# Altium PCB PCB-Main.PcbDoc
Units mm, origin at the board's own origin, x right, y up, seen from the top; angles counter-clockwise.
Board outline 45.2 x 20.4 mm, 2 copper layers (Top Layer, Bottom Layer), stack 1.271 mm thick; 40 components, 26 nets, 142 pads, 46 vias.
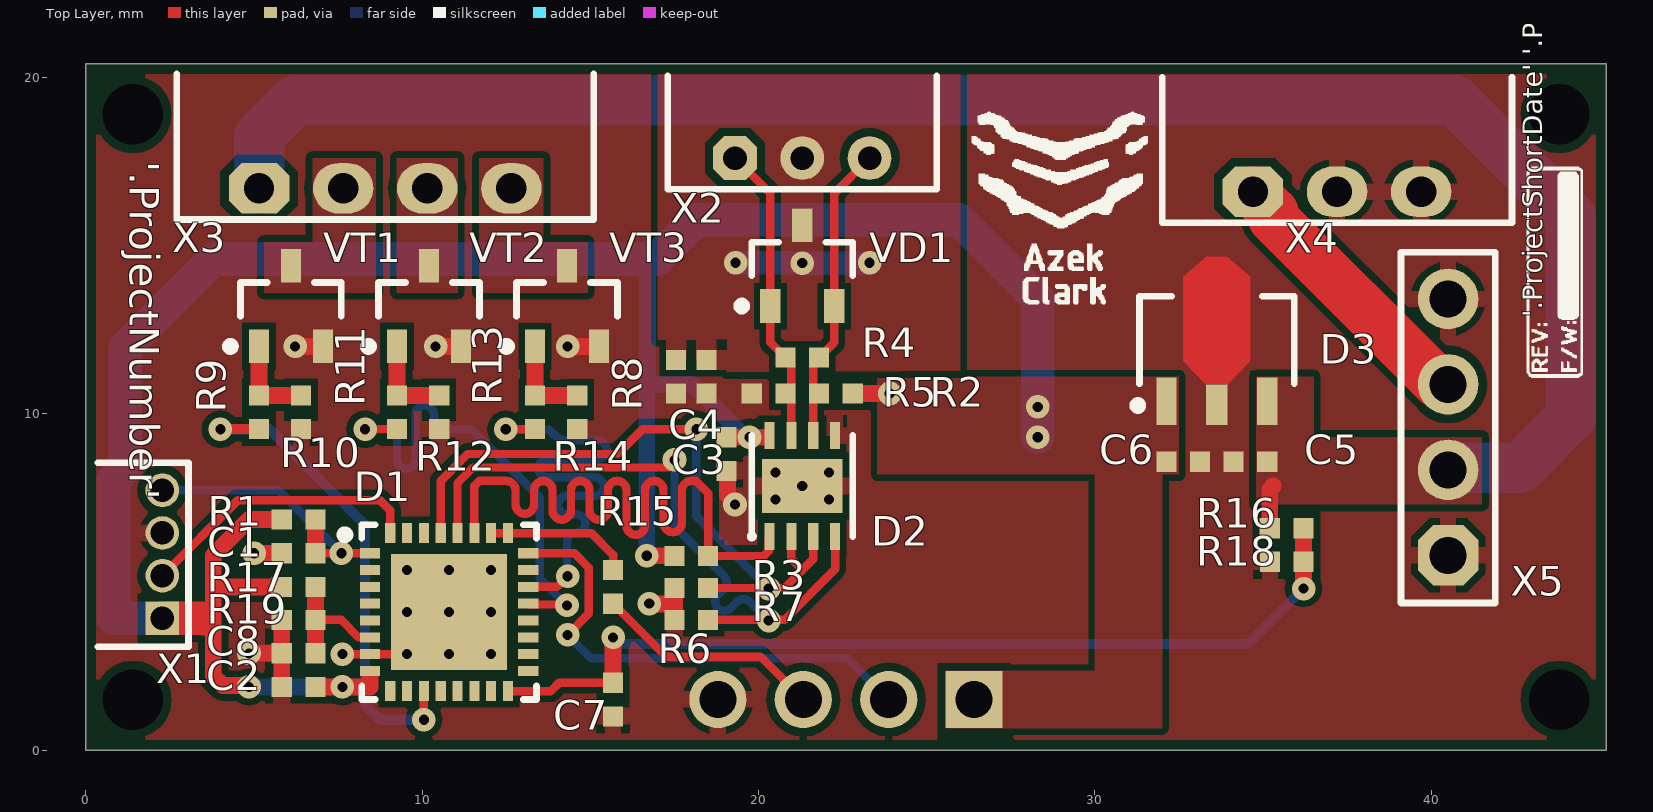
[diagram p0: Top Layer view]
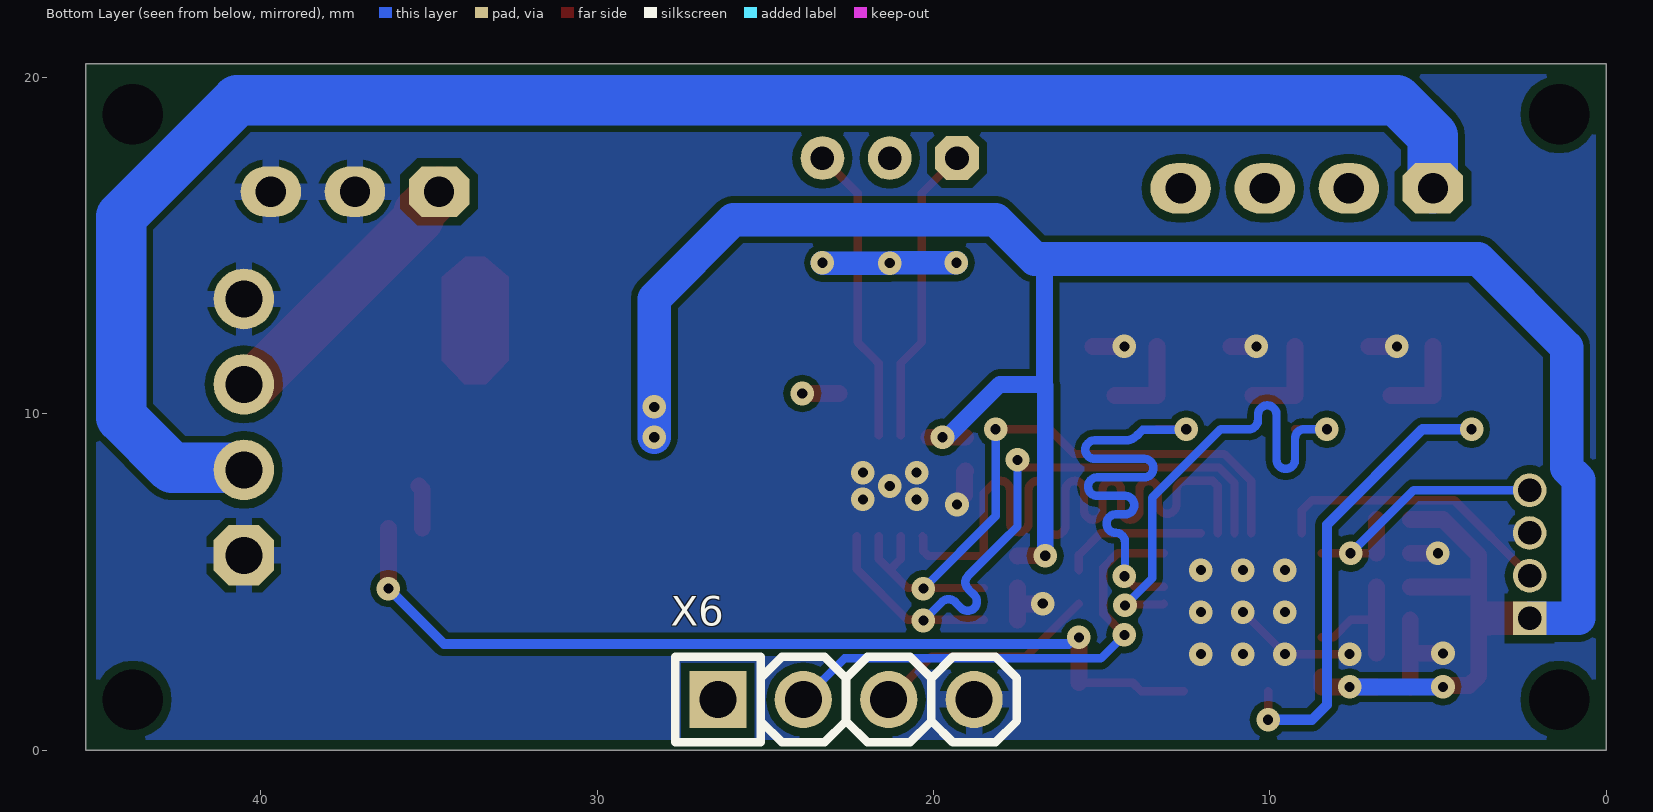
[diagram p1: Bottom Layer view, seen from below]
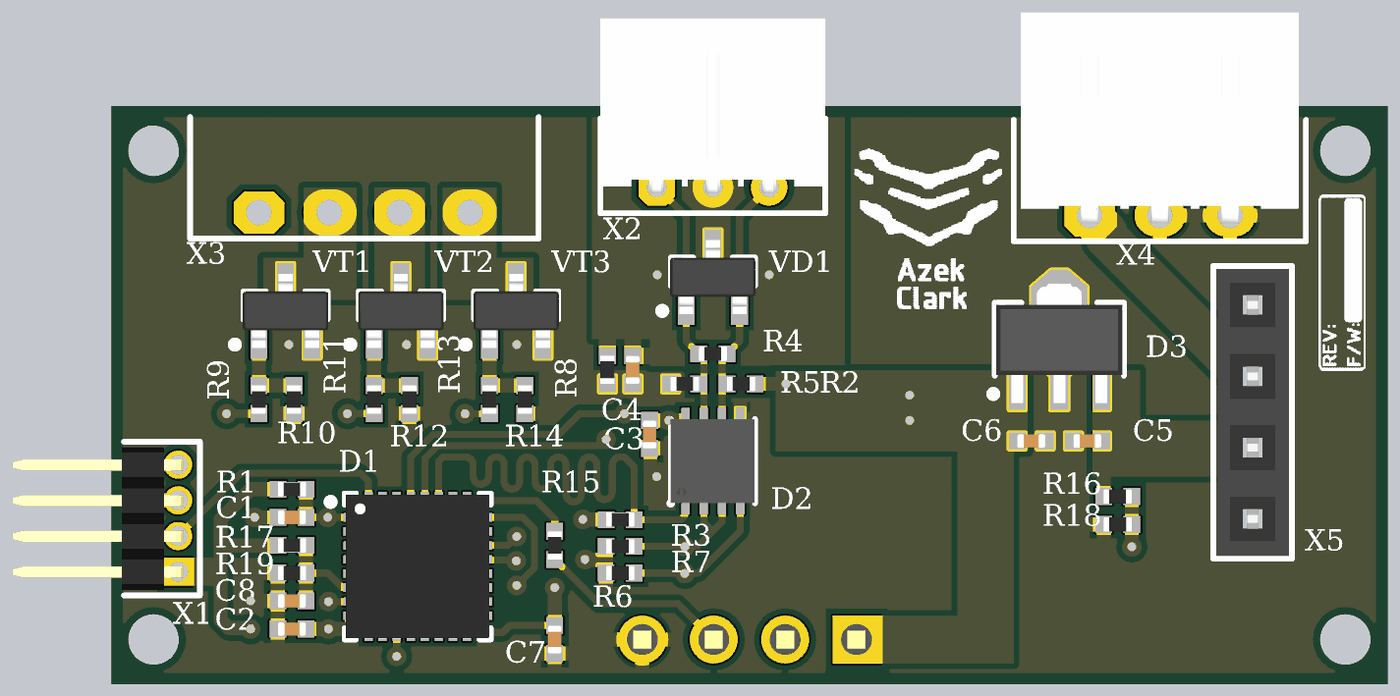
[diagram p2: 3D render of the assembled board from above, using the file's embedded part models]

## Layer stack, top to bottom
Top Solder: solder mask 0.0102, Solder Resist, Dk 3.5
Top Layer: signal copper 0.0356
Dielectric 1: dielectric 1.2, FR-4, Dk 4.8
Bottom Layer: signal copper 0.0356
Bottom Solder: solder mask 0.0102, Solder Resist, Dk 3.5

## Board outline
0,0 0,20.4 45.2,20.4 45.2,0

## Design rules (kind name [scope] priority, off if disabled: settings)
BoardOutlineClearance [All] p1: gap=0.3 ignorepadtopadclearanceinfootprint=FALSE
Clearance Clearance_NPTH [All vs InPadClass('NPTH')] p1: gap=0.4 ignorepadtopadclearanceinfootprint=FALSE except(0: Arc-Hole Track-Hole SMDPad-Hole THPad-Hole Via-Hole Fill-Hole Poly-Hole Region-Hole Text-Hole)
Clearance Clearance_MultiLayerPad [OnLayer('Multi-Layer') and IsPad] p2: gap=0.25 ignorepadtopadclearanceinfootprint=FALSE except(0: Arc-Hole Track-Hole SMDPad-Hole THPad-Hole Via-Hole Fill-Hole Poly-Hole Region-Hole Text-Hole)
Clearance Clearance_Polygon [InPolygon] p3: gap=0.2 ignorepadtopadclearanceinfootprint=FALSE except(0: Arc-Hole Track-Hole SMDPad-Hole THPad-Hole Via-Hole Fill-Hole Poly-Hole Region-Hole Text-Hole)
Clearance [All] p4: gap=0.15 ignorepadtopadclearanceinfootprint=FALSE except(0: Arc-Hole Track-Hole SMDPad-Hole THPad-Hole Via-Hole Fill-Hole Poly-Hole Region-Hole Text-Hole)
ComponentClearance [All] p1: gap=-0.2 collisioncheckmode=3 verticalgap=0.254 showdistances=FALSE
DiffPairsRouting [All] p1: maxlimit=0.254 minlimit=0.2 mostfreqgap=0.254 toplayer_minwidth=0.2 toplayer_maxwidth=0.5 toplayer_prefwidth=0.3 bottomlayer_minwidth=0.2 bottomlayer_maxwidth=0.5 bottomlayer_prefwidth=0.3 maxuncoupledlength=12.7
Height [All] p1: minheight=0 maxheight=60 prefheight=12.7
HoleSize [All] p1: absolutevalues=TRUE maxlimit=5 minlimit=0.025 maxpercent=80.000 minpercent=20.000
HoleToHoleClearance [All] p1: gap=0.2 allowstackedmicrovias=TRUE
MatchedLengths "Schematic Matched Net Lengths_2" [InNetClass('RS485')] p1: tolerance=0.05 checknetsindiffpair=TRUE checkdiffpairvsdiffpair=FALSE checkxsignals=FALSE checkothers=FALSE
MatchedLengths "Schematic Matched Net Lengths_1" [InNetClass('RS485 UART')] p2: tolerance=0.1 checknetsindiffpair=FALSE checkdiffpairvsdiffpair=TRUE checkxsignals=TRUE checkothers=TRUE
MatchedLengths "Schematic Matched Net Lengths" [InNetClass('PWM LED')] p3: tolerance=0.1 checknetsindiffpair=FALSE checkdiffpairvsdiffpair=TRUE checkxsignals=TRUE checkothers=TRUE
MatchedLengths MatchedLengths_RMII [InNetClass('RMII')] p4: tolerance=2.54 checknetsindiffpair=FALSE checkdiffpairvsdiffpair=TRUE checkxsignals=TRUE checkothers=TRUE
MinimumSolderMaskSliver [All] p1: minsoldermaskwidth=0.05
PlaneClearance [All] p1: clearance=0.5
PlaneConnect [All] p1: planeconnectstyle=Relief reliefexpansion=0.5 reliefentries=4 reliefconductorwidth=0.3 reliefairgap=0.2
PolygonConnect PolygonConnect_PowerPAD [All vs InPadClass('PowerPAD')] p1: connectstyle=Relief reliefconductorwidth=1 reliefentries=4 polygonreliefangle="90 Angle" airgapwidth=0.3
PolygonConnect PolygonConnect_PadGND [InNet('GND') and IsPad] p2: connectstyle=Relief reliefconductorwidth=0.5 reliefentries=4 polygonreliefangle="90 Angle" airgapwidth=0.2
PolygonConnect PolygonConnect_Via [IsVia] p3: connectstyle=Direct reliefconductorwidth=0.254 reliefentries=4 polygonreliefangle="90 Angle" airgapwidth=0.254
PolygonConnect [All] p4: connectstyle=Relief reliefconductorwidth=0.6 reliefentries=4 polygonreliefangle="90 Angle" airgapwidth=0.3
RoomDefinition Board-ADC [InComponentClass('Board-ADC')] p1: confinementstyle=ConfineIn formatcopy=TRUE lockcomponents=FALSE outline 4.489,0 37.2,0 37.2,7.528 4.489,7.528
RoomDefinition Board-Ultrasonic [InComponentClass('Board-Ultrasonic')] p2: confinementstyle=ConfineIn formatcopy=TRUE lockcomponents=FALSE outline 14.609,-0.85 28.3,-0.85 28.3,6.101 14.609,6.101
RoomDefinition MCU [InComponentClass('MCU')] p3: confinementstyle=ConfineIn formatcopy=TRUE lockcomponents=FALSE outline -4.15,1 14.004,1 14.004,8.757 -4.15,8.757
RoomDefinition Board-RS485 [InComponentClass('Board-RS485')] p4: confinementstyle=ConfineIn formatcopy=TRUE lockcomponents=FALSE outline 25.65,2.9 25.65,24 16.2,24 16.2,2.9
RoomDefinition Board-PWM [InComponentClass('Board-PWM')] p5: confinementstyle=ConfineIn formatcopy=TRUE lockcomponents=FALSE outline 2.5,7.9 16.3,7.9 16.3,24.4 2.5,24.4
RoomDefinition Board-PowerSupply [InComponentClass('Board-PowerSupply')] p6: confinementstyle=ConfineIn formatcopy=TRUE lockcomponents=FALSE outline 30.612,3.739 42.884,3.739 42.884,24.4 30.612,24.4
RoutingVias [All] p1: holewidth=0.3 width=0.7 viastyle="Through Hole" minholewidth=0.3 minwidth=0.7 maxholewidth=0.5 maxwidth=1.2
SilkToSilkClearance [All] p1: silktosilkclearance=0
SilkToSolderMaskClearance [IsPad] p1: minsilkscreentomaskgap=0.05 clearancetoexposedcopper=TRUE
SolderMaskExpansion SolderMaskExpansion_Vias [IsVia] p1: expansion=0.102 istentingtop=TRUE
SolderMaskExpansion [All] p2: expansion=0.075 istentingtop=FALSE
Width [All] p1: maxlimit=10 minlimit=0.15 preferedwidth=0.15
20 further rules are at their usual default settings.

## Classes and differential pairs
component class Board-ADC: C7 C8 R16 R17 R18 R19
net class "RS485 UART": "RS485 DIR" "RS485 RX" "RS485 TX"
net class RS485: RS485_N RS485_P
net class "PWM LED": "PWM CH1" "PWM CH2" "PWM CH3"
component class MCU: C1 C2 D1 R1 X1
component class Board-Ultrasonic: R15 X6
component class Board-RS485: C3 C4 D2 R2 R3 R4 R5 R6 R7 R8 VD1 X2
component class Board-PWM: R9 R10 R11 R12 R13 R14 VT1 VT2 VT3 X3
component class Board-PowerSupply: C5 C6 D3 X4 X5
differential pair RS485: +RS485_P -RS485_N

## Components (designator, comment, footprint, x,y, rotation, side; value= is the part's Value field where it differs from the comment)
C1 "100nF" CH0402C 6.325,5.85 r0 top
C2 "100nF" CH0402C 6.325,1.875 r0 top
C3 "100nF" CH0402C 19.05,8.8 r90 top
C4 "100nF" CH0402C 18.45,11.1 r90 top
C5 "100nF" CH0402C 34.625,8.57 r0 top
C6 "100nF" CH0402C 32.625,8.57 r180 top
C7 "100nF" CH0402C 15.671,1.5 r90 top
C8 "100nF" CH0402C 6.325,2.875 r0 top
D1 "STM8L151KxU6" 32-UFQFPN 10.8,4.1 r0 top
D2 "SIT3088E" "8-DFN (3x3 mm, 0.65mm pitch)" 21.3,7.85 r0 top
D3 "L78L33ACUTR" SOT89_123 33.625,12.17 r90 top
R1 "10k" CH0402R 6.325,6.85 r180 top
R2 "10k" CH0402R 22.3,10.6 r0 top
R3 "10k" CH0402R 18,5.767 r180 top
R4 "120" CH0402R 21.3,11.671 r0 top
R5 "10k" CH0402R 20.3,10.6 r0 top
R6 "10k" CH0402R 18,3.867 r0 top
R7 "10k" CH0402R 18,4.817 r0 top
R8 "120" CH0402R 17.55,11.1 r90 top
R9 "22" CH0402R 5.146,10.045 r90 top
R10 "10k" CH0402R 6.4,10.045 r90 top
R11 "22" CH0402R 9.25,10.045 r90 top
R12 "10k" CH0402R 10.504,10.045 r90 top
R13 "22" CH0402R 13.354,10.045 r90 top
R14 "10k" CH0402R 14.609,10.045 r90 top
R15 "22" CH0402R 15.671,4.85 r270 top
R16 "21k" CH0402R 35.7,6.592 r180 top
R17 "3k" CH0402R 6.325,4.85 r180 top
R18 "3k" CH0402R 35.704,5.597 r0 top
R19 "3k" CH0402R 6.325,3.867 r0 top
VD1 "SM712" SOT23_132 21.3,14.4 r90 top
VT1 "SI2302S" SOT23_123 6.096,13.2 r90 top
VT2 "SI2302S" SOT23_123 10.2,13.2 r90 top
VT3 "SI2302S" SOT23_123 14.304,13.2 r90 top
X1 "PLS1.27-4R" "CON: PLS1.27-4R" 2.275,5.819 r90 top
X2 "PH-3AW" "CON: PH-3AW" 21.3,17.6 r0 top
X3 "XH-4AW" "CON: XH-4AW" 8.9,16.7 r0 top
X4 "XH-3AW" "CON: XH-3AW" 37.2,16.6 r0 top
X5 "PBS-4" "CON: PBS-4" 40.5,9.6 r90 top locked
X6 "PLS-4" "CON: PLS-4" 22.6,1.5 r180 bottom

## Footprints (in the part's own frame and the unit in brackets; to place one, negate y for a bottom-side part, rotate by r counter-clockwise, add the part's x,y. Pads: shape width x height; smd on the part's side, far side on the other; paste and mask are expansions set on the pad)
"8-DFN (3x3 mm, 0.65mm pitch)" [mm]
  rect 2.4x1.6 smd: 0(0,0)
  rect 0.3x0.8 smd: 1(-0.975,-1.5) 2(-0.325,-1.5) 3(0.325,-1.5) 4(0.975,-1.5) 5(0.975,1.5) 6(0.325,1.5) 7(-0.325,1.5) 8(-0.975,1.5)
  silkscreen extent -1.6,-1.6 1.5,1.5, body extent -1.5,-1.5 1.48,1.5
32-UFQFPN [mm] "32-lead, 5 x 5 mm, 0.5 mm pitch"
  rect 3.45x3.45 smd: 0(0,0)
  rect 0.6x0.3 smd: 1(-2.35,1.75) 2(-2.35,1.25) 3(-2.35,0.75) 4(-2.35,0.25) 5(-2.35,-0.25) 6(-2.35,-0.75) 7(-2.35,-1.25) 8(-2.35,-1.75) 17(2.35,-1.75) 18(2.35,-1.25) 19(2.35,-0.75) 20(2.35,-0.25) 21(2.35,0.25) 22(2.35,0.75) 23(2.35,1.25) 24(2.35,1.75)
  rect 0.3x0.6 smd: 9(-1.75,-2.35) 10(-1.25,-2.35) 11(-0.75,-2.35) 12(-0.25,-2.35) 13(0.25,-2.35) 14(0.75,-2.35) 15(1.25,-2.35) 16(1.75,-2.35) 25(1.75,2.35) 26(1.25,2.35) 27(0.75,2.35) 28(0.25,2.35) 29(-0.25,2.35) 30(-0.75,2.35) 31(-1.25,2.35) 32(-1.75,2.35)
  silkscreen extent -3.2,-2.6 2.6,2.6, body extent -2.56,-2.56 2.56,2.56, height 0.6
CH0402C [mm]
  rect 0.6x0.6 smd: 1(-0.5,0) 2(0.5,0)
  body extent -0.5,-0.25 0.5,0.25, height 0.5
CH0402R [mm]
  rect 0.6x0.6 smd: 1(-0.5,0) 2(0.5,0)
  body extent -0.5,-0.25 0.5,0.25, height 0.34
"CON: PBS-4" [mm] "PBS-5"
  oct 1.8x1.8 hole 1.1: 1(-3.81,0)
  round 1.8 hole 1.1: 2(-1.27,0) 3(1.27,0) 4(3.81,0)
  silkscreen extent -5.23,-1.4 5.2,1.4, body extent -5.08,-1.27 5.08,1.27, height 8.4
"CON: PH-3AW" [mm] "PH Header Male 2.00mm, 3 pins, through hole"
  oct 1.3x1.3 hole 0.7: 1(-2,0)
  round 1.3 hole 0.7: 2(0,0) 3(2,0)
  silkscreen extent -4,-0.92 4,2.45, body extent -4,-0.23 4,6.02, height 5
"CON: PLS1.27-4R" [mm] "PLS1.27 4 pin header, right angled"
  rect 1x1 hole 0.7: 1(-1.905,0)
  round 1 hole 0.7: 2(-0.635,0) 3(0.635,0) 4(1.905,0)
  silkscreen extent -2.75,-0.77 2.73,1.92, body extent -2.55,-0.19 2.53,5.89, height 2.47
"CON: PLS-4" [mm] "PLS-40 4 pin header"
  rect 1.7x1.7 hole 1.1: 1(-3.81,0)
  round 1.7 hole 1.1: 2(-1.27,0) 3(1.27,0) 4(3.81,0)
  silkscreen extent -5.08,-1.27 5.08,1.27, body extent -5.08,-1.27 5.08,1.27, height 8.54
"CON: XH-3AW" [mm] "PH Header Male 2.50mm, 3 pins, through hole"
  oct 1.8x1.5 hole 0.9: 1(-2.5,0)
  oval 1.8x1.5 hole 0.9: 2(0,0) 3(2.5,0)
  silkscreen extent -5.2,-0.92 5.2,3.4, body extent -4.95,-0.3 4.95,7.24, height 5.8
"CON: XH-4AW" [mm] "PH Header Male 2.50mm, 4 pins, through hole"
  oct 1.8x1.5 hole 0.9: 1(-3.75,0)
  oval 1.8x1.5 hole 0.9: 2(-1.25,0) 3(1.25,0) 4(3.75,0)
  silkscreen extent -6.2,-0.92 6.2,3.4, body extent -6.2,-0.34 6.2,7.2, height 5.8
SOT23_123 [mm] "SOT23, 3-Leads, Body 3,0x2,6mm (max), Pitch 0,95mm, IPC Medium Density"
  rect 1x0.6 smd: 1(-1.2,0.95) 2(1.2,0) 3(-1.2,-0.95)
  round 0.5 on Mech1: ""(-0.9,1.1)
  silkscreen extent -1.32,-1.5 0.7,1.92, body extent -1.32,-1.52 1.32,1.52, height 1.12
SOT23_132 [mm] "SOT23, 3-Leads, Body 3,0x2,6mm (max), Pitch 0,95mm, IPC Medium Density"
  rect 1x0.6 smd: 1(-1.2,0.95) 2(-1.2,-0.95) 3(1.2,0)
  round 0.5 on Mech1: ""(-0.9,1.1)
  silkscreen extent -1.32,-1.5 0.7,1.92, body extent -1.32,-1.52 1.32,1.52, height 1.12
SOT89_123 [mm] "SOT89, 3-Leads, Body 4,50x2,45mm, Pitch 1,50mm, Lead Span 4,1mm, IPC Medium Density"
  rect 1.4x0.6 smd: 1(-1.8,1.5) 3(-1.8,-1.5)
  rect 1.2x0.65 smd: 2(-1.9,0)
  round 0.5 on Mech1: ""(-1.8,1.8)
  Top Layer region: -1.3,0.325 -0.6,1 1.9,1 2.5,0.3 2.5,-0.3 1.9,-1 -0.6,-1 -1.3,-0.325
  silkscreen extent -2.05,-2.3 1.32,2.47, body extent -2.25,-2.25 2,2.25, height 1.54

## Part data
C1 C2 C3 C4 C5 C6 C7 C8: library part Capacitor, Manufacturer=CCTC, ComponentKind="X7R, 50V", HelpURL=https://lcsc.com/product-detail/Multilayer-Ceramic-Capacitors-MLCC-SMD-SMT_CCTC-TCC0402X7R104K250AT_C466234.html, Model=TCC0402X7R104K250AT
D1: "STM8", Manufacturer="ST Microelectronics", ComponentKind="1.8-3.6V, UFQFPN32", HelpURL=https://ru.mouser.com/datasheet/2/389/stm8l151c4-956418.pdf, Model=STM8L151K4U6
D2: "RS485/RS422", Manufacturer=SIT, ComponentKind="3-5.5V, 1/8", HelpURL=https://lcsc.com/product-detail/RS-485-RS-422-ICs_SIT-SIT3088ETK_C601076.html, Model=SIT3088E
D3: library part L78LxxACUTR, "Step-down", Manufacturer="ST Microelectronics", ComponentKind="SOT-89, 100mA", HelpURL=https://www.st.com/resource/en/datasheet/l78l.pdf, Model=L78L33ACUTR
R1 R2 R3 R5 R6 R7 R10 R12 R14 R16 R17 R18 R19: library part Resistor, Manufacturer="Uniroyal Elec", ComponentKind=±1%
  R1 R2 R3 R5 R6 R7 R10 R12 R14: HelpURL=https://lcsc.com/product-detail/Chip-Resistor-Surface-Mount_UNI-ROYAL-Uniroyal-Elec-0402WGF1002TCE_C25744.html, Model=0402WGF1002TCE
  R16: HelpURL=https://lcsc.com/product-detail/Chip-Resistor-Surface-Mount_UNI-ROYAL-Uniroyal-Elec-0402WGF2102TCE_C25766.html, Model=0402WGF2102TCE
  R17 R18 R19: HelpURL=https://lcsc.com/product-detail/Chip-Resistor-Surface-Mount_UNI-ROYAL-Uniroyal-Elec-0402WGF3001TCE_C25784.html, Model=0402WGF3001TCE
R4 R8 R9 R11 R13 R15: library part Resistor, Manufacturer=YAGEO, ComponentKind=±1%
  R4 R8: HelpURL=https://lcsc.com/product-detail/Chip-Resistor-Surface-Mount_YAGEO-RC0402FR-07120RL_C114758.html, Model=RC0402FR-07120RL
  R9 R11 R13 R15: HelpURL=https://lcsc.com/product-detail/Chip-Resistor-Surface-Mount_22R-22R0-1_C114765.html, Model=RC0402FR-0722RL
VD1: library part "TVS Array", Manufacturer="TECH PUBLIC", ComponentKind="7V/12V, 150W", HelpURL=https://lcsc.com/product-detail/TVS_TECH-PUBLIC-SM712_C521963.html, Model=SM712
VT1 VT2 VT3: library part N-chanel, "Mosfet", Manufacturer="Microdiode Electronics", ComponentKind="20V, 2.3A, 1.5V", HelpURL=https://lcsc.com/product-detail/MOSFET_MDD-Microdiode-Electronics-SI2302S_C427388.html, Model=SI2302S
X1 X3 X5 X6: library part 4-Connector
  X1: Model=PLS1.27-4R
  X3: Model=XH-4AW
  X5: Model=PBS-4, System=Connector
  X6: Model=PLS-4
X2 X4: library part 3-Connector
  X2: Model=PH-3AW
  X4: Model=XH-3AW

## Free pads (board coordinates)
  round 0 hole 1.8 unplated paste+0: 0(1.4,1.5) 0(1.4,18.9) 0(43.8,1.5) 0(43.8,18.9)

## Via types
v1: diameter 0.7, hole 0.3, Top Layer to Bottom Layer, tented both sides, 46 vias

## Nets (pads, with @x,y where several pads share a name; then routed paths per layer and width w, separated by ;. In a path a pad name is that pad's centre, name@x,y a point inside that pad or via, vN(x,y) a via of type N, cw(c..) or ccw(c..) an arc to the next point about the centre after c; other vN are vias at no path point)
3V3: C2.2 C3.2 C6.2 D1.8 D2.8 D3.1 R1.2 R2.2 R3.2 R17.2 X1.1 X6.1 | length 74.2
  Top Layer w0.5: v1(4.85,1.875) 4.812,1.913 4.078,1.913 3.785,2.206 3.785,4.85 ; R17.2 3.785,4.85 ; R1.2 4.85,6.85 3.785,5.785 3.785,4.85 ; C2.2 v1(7.625,1.875) 8.45,1.875 8.45,2.175 ; v1(16.675,5.775) 17.492,5.775 R3.2 ; C3.2 v1(19.731,9.3) 20.14,9.3 ; R2.2 v1(23.9,10.6)
  Top Layer w1: X1.1 3.486,3.914 3.5,3.9
  Bottom Layer w0.5: v1(4.85,1.875) v1(7.625,1.875) ; v1(16.675,5.775) 16.675,10.845 16.7,10.87 ; 16.7,14.6 16.7,10.87 ; v1(19.731,9.3) 19.6,9.3 18.03,10.87 16.7,10.87
  Bottom Layer w1: X1.1 0.822,3.914 0.822,8.039 1.175,8.392 1.175,11.975 3.8,14.6 16.7,14.6 16.98,14.6 18.15,15.77 25.952,15.77 28.3,13.422 v1(28.3,10.2) v1(28.3,9.3)
12V: C5.2 D3.3 R16.2 X3.1 X5.2 | length 54
  Top Layer w0.5: R16.2 35.2,7.75 35.3,7.85
  Bottom Layer w1.5: X3.1 5.15,18.25 6.218,19.318 40.695,19.318 44.15,15.863 44.15,9.9 42.637,8.387 40.557,8.387 X5.2
"ADC 3V": C8.2 D1.6 R17.1 R19.2 | length 3.8
  Top Layer w0.25: R19.2 7.594,3.867 8.111,3.35 D1.6
  Top Layer w0.5: C8.2 R19.2 R17.1
"ADC 12V": C7.2 D1.16 R16.1 R18.2 | length 27.7
  Top Layer w0.25: D1.16 13.823,1.75 14.073,2 C7.2
  Top Layer w0.5: C7.2 15.675,2.004 v1(15.675,3.35) ; R16.1 36.202,6.59 36.202,5.599 R18.2 v1(36.204,4.8)
  Bottom Layer w0.3: v1(15.675,3.35) 15.783,3.35 15.983,3.15 16,3.15 34.554,3.15 v1(36.204,4.8)
GND: C1.1 C2.1 C3.1 C4.1 C5.1 C6.1 C7.1 C8.1 D1.0 D1.7 D2.0 D2.5 D3.2 R5.1 R6.1 R7.1 R8.1 R10.1 R12.1 R14.1 R18.1 R19.1 VT1.3 VT2.3 VT3.3 X1.3 X4.2 X4.3 X5.1 X5.4 X6.4 | length 12.8
  Top Layer w0.25: v1(7.625,2.85) D1.7 v1(9.55,2.85) v1(10.8,4.1)
  Top Layer w0.5: v1(4.85,2.875) C8.1 ; v1(5,5.85) C1.1 ; C2.1 C8.1 ; R19.1 C8.1 ; v1(6.218,12) VT1.3 ; v1(10.4,12) VT2.3 ; v1(14.321,12) VT3.3 ; v1(16.751,4.35) 16.759,4.342 17.476,4.342 ; R6.1 R7.1 ; C3.1 19.076,8.274 19.076,7.578 19.3,7.354 v1(19.3,7.3)
  other v1: 10.8,2.85 12.05,2.85 9.55,4.1 12.05,4.1 9.55,5.35 10.8,5.35 12.05,5.35 20.5,7.45 22.1,7.45 21.3,7.85 20.5,8.25 22.1,8.25
"MCU R\S\T\": C1.2 D1.1 R1.1 X1.4 | length 8.7
  Top Layer w0.25: C1.2 v1(7.598,5.85) D1.1
  Top Layer w0.5: C1.2 R1.1
  Bottom Layer w0.25: X1.4 5.724,7.724 v1(7.598,5.85)
"MCU SWIM": D1.32 X1.2 | length 8.5
  Top Layer w0.25: X1.2 4.516,7.425 8.75,7.425 9.05,7.125 D1.32
NetC4_2: C4.2 R8.2 VD1.3 X2.2 | length 4
  Bottom Layer w0.7: v1(19.32,14.487) 21.288,14.487 v1(21.3,14.475) 23.288,14.475 v1(23.3,14.487)
NetR9_2: R9.2 R10.2 VT1.1 | length 2.7
  Top Layer w0.5: VT1.1 R9.2 R10.2
NetR11_2: R11.2 R12.2 VT2.1 | length 2.7
  Top Layer w0.5: VT2.1 R11.2 R12.2
NetR13_2: R13.2 R14.2 VT3.1 | length 2.7
  Top Layer w0.5: VT3.1 R13.2 R14.2
NetR15_2: R15.2 X6.3 | length 6.8
  Top Layer w0.25: R15.2 17.246,2.775 20.055,2.775 X6.3
NetVT1_2: VT1.2 X3.2
NetVT2_2: VT2.2 X3.3
NetVT3_2: VT3.2 X3.4
"PWM CH1": D1.11 R9.1 | length 14.8
  Top Layer w0.25: v1(10.05,0.9) D1.11
  Top Layer w0.3: v1(4,9.537) 4.004,9.541 5.142,9.541 R9.1
  Bottom Layer w0.3: v1(4,9.537) 5.463,9.537 8.3,6.7 8.3,1.346 8.746,0.9 v1(10.05,0.9)
"PWM CH2": D1.21 R11.1 | length 14.8
  Top Layer w0.25: v1(8.3,9.537) 8.45,9.537 8.457,9.545 R11.1 ; D1.21 13.175,4.325 14.279,4.325 v1(14.304,4.3)
  Bottom Layer w0.25: v1(8.3,9.537) 8.975,9.537 cw(c8.975,9.262) 9.25,9.262 9.25,8.632 ccw(c9.525,8.632) 9.525,8.357 ccw(c9.525,8.632) 9.8,8.632 9.8,9.971 cw(c10.075,9.971) 10.075,10.246 cw(c10.075,9.971) 10.35,9.971 10.35,9.812 ccw(c10.625,9.812) 10.625,9.537 11.317,9.537 11.463,9.537 13.5,7.5 13.5,5.104 v1(14.304,4.3)
"PWM CH3": D1.22 R13.1 | length 14.8
  Top Layer w0.25: v1(12.483,9.537) 12.487,9.541 13.351,9.541 R13.1 ; D1.22 14.004,4.85 v1(14.321,5.167)
  Bottom Layer w0.25: v1(12.483,9.537) 12.503,9.517 13.783,9.517 13.831,9.469 13.956,9.344 13.957,9.343 ccw(c14.288,9.676) 14.288,9.207 15.209,9.207 cw(c15.209,8.932) 15.484,8.932 cw(c15.209,8.932) 15.209,8.657 13.734,8.657 ccw(c13.734,8.382) 13.459,8.382 ccw(c13.734,8.382) 13.734,8.107 15.129,8.107 cw(c15.129,7.832) 15.404,7.832 cw(c15.129,7.832) 15.129,7.557 14.304,7.557 ccw(c14.304,7.282) 14.029,7.282 ccw(c14.304,7.282) 14.304,7.007 14.579,7.007 cw(c14.579,6.732) 14.854,6.732 cw(c14.579,6.732) 14.579,6.457 ccw(c14.579,6.182) 14.304,6.182 14.304,5.184 v1(14.321,5.167)
"RS485 DIR": D1.29 D2.2 D2.3 R7.2 | length 20.7
  Top Layer w0.25: D1.29 10.55,8 11.35,8.8 15.814,8.8 16.551,9.537 v1(18.15,9.537) ; R7.2 20.3,4.817 20.767,4.817 21.3,5.35 ; D2.2 20.975,5.675 21.3,5.35 ; D2.3 21.625,5.675 21.3,5.35
  Bottom Layer w0.25: v1(18.15,9.537) 18.15,6.95 v1(20.3,4.8)
"RS485 RX": D1.27 D2.1 R3.1 | length 23.2
  Top Layer w0.25: D1.27 11.55,7.854 11.696,8 11.824,8 12.499,8 cw(c12.499,7.725) 12.774,7.725 12.774,7.3 ccw(c13.049,7.3) 13.049,7.025 ccw(c13.049,7.3) 13.324,7.3 13.324,7.725 cw(c13.599,7.725) 13.599,8 cw(c13.599,7.725) 13.874,7.725 13.874,7.125 ccw(c14.149,7.125) 14.149,6.85 ccw(c14.149,7.125) 14.424,7.125 14.424,7.725 cw(c14.699,7.725) 14.699,8 cw(c14.699,7.725) 14.974,7.725 14.974,7.125 ccw(c15.249,7.125) 15.249,6.85 ccw(c15.249,7.125) 15.524,7.125 15.524,7.725 cw(c15.799,7.725) 15.799,8 cw(c15.799,7.725) 16.074,7.725 16.074,6.675 ccw(c16.349,6.675) 16.349,6.4 ccw(c16.349,6.675) 16.624,6.675 16.624,7.725 cw(c16.899,7.725) 16.899,8 cw(c16.899,7.725) 17.174,7.725 17.174,6.754 ccw(c17.449,6.754) 17.449,6.479 ccw(c17.449,6.754) 17.724,6.754 17.724,7.725 cw(c17.999,7.725) 17.999,8 18.14,8 18.404,7.736 18.5,7.64 R3.1 20.154,5.767 20.3,5.913 20.3,6.325 D2.1
"RS485 TX": D1.28 D2.4 R6.2 | length 20.7
  Top Layer w0.25: D1.28 11.05,7.934 11.516,8.4 17.325,8.4 17.501,8.575 v1(17.501,8.625) ; R6.2 20.3,3.867 20.767,3.867 22.275,5.375 D2.4
  Bottom Layer w0.25: v1(17.501,8.625) 17.501,6.649 17.968,6.182 18.3,5.85 18.969,5.181 cw(c18.774,4.987) 18.969,4.792 18.786,4.609 ccw(c18.98,4.415) 18.786,4.22 ccw(c18.98,4.415) 19.175,4.22 19.358,4.403 cw(c19.552,4.209) 19.747,4.403 19.835,4.315 v1(20.3,3.85)
RS485_N: D2.7 R4.1 R5.2 VD1.1 X2.1 | length 8.9
  Top Layer w0.25: X2.1 20.35,16.55 VD1.1 20.35,12.121 R4.1 20.975,11.496 20.975,10.6 D2.7
RS485_P: D2.6 R2.1 R4.2 VD1.2 X2.3 | length 8.9
  Top Layer w0.25: D2.6 21.625,10.6 21.625,11.496 R4.2 22.25,12.121 VD1.2 22.25,16.55 X2.3
"US ECHO": D1.25 D1.26 R15.1 | length 4.3
  Top Layer w0.25: D1.26 D1.25 15.025,6.45 15.675,5.8 15.675,5.354 R15.1
"US TRIG": D1.24 X6.2 | length 14.6
  Top Layer w0.25: D1.24 14.522,5.85 14.946,5.426 14.946,4.05 v1(14.321,3.425)
  Bottom Layer w0.25: v1(14.321,3.425) 15.021,2.725 22.645,2.725 X6.2
VIN: X4.1 X5.3 | length 8.3
  Top Layer w1.5: X4.1 34.7,16.589 35.3,15.989 35.3,15.813 40.186,10.927 40.443,10.927 X5.3
pads on no net: D1.2 D1.3 D1.4 D1.5 D1.9 D1.10 D1.12 D1.13 D1.14 D1.15 D1.17 D1.18 D1.19 D1.20 D1.23 D1.30 D1.31 D3. VD1. VT1. VT2. VT3.

## Polygon pours and split planes (outlines as drawn)
GND on Top Layer "GND_L01_P009" (solid, remove dead copper, pour order 9): 0,20.4 0,0 45.2,0 45.2,20.4
3V3 on Top Layer "3V3_L01_P008" (solid, pour order 8): 32.5,11.1 32.5,8.2 23.535,8.2 23.535,11.1
3V3 on Top Layer "3V3_L01_P001" (solid, pour order 1): 32,8.3 32,0.65 25.575,0.65 25.575,2.35 30,2.35 30,8.3
NetC4_2 on Top Layer "NETC4_2_L01_P000" (solid, pour order 0): 17,11.22 17,20.4 26,20.4 26,11.274
12V on Top Layer "12V_L01_P003" (solid, pour order 3): 34.8,7.3 34.8,11.1 36.5,11.1 36.5,9.3 41.5,9.3 41.5,7.3 36.5,7.3
NetVT3_2 on Top Layer "NETVT3_2_L01_P006" (solid, pour order 6): 11.691,17.6 11.691,13.6 14.916,13.6 14.916,15.1 13.6,15.1 13.6,17.6
NetVT2_2 on Top Layer "NETVT2_2_L01_P005" (solid, pour order 5): 9.25,17.6 9.25,13.6 11.05,13.6 11.05,17.6
NetVT1_2 on Top Layer "NETVT1_2_L01_P004" (solid, pour order 4): 8.625,17.6 8.625,13.6 5.3,13.6 5.3,15.1 6.745,15.1 6.745,17.6
GND on Bottom Layer "GND_L02_P010" (solid, pour order 10): 0,20.4 0,0 45.2,0 45.2,20.4

## Silkscreen, mask and mechanical layers (free items; w line width, h text height)
Top Overlay:
  drawing of 953 lines, arcs and shapes, not listed
  text "'.ProjectNumber'" at 1,17.499 h1.5 r270
  text "'.ProjectShortDate' '.ProjectRevision'" at 43.5,12.874 h1 r90
Board Shape:
  the board outline again, w0.2